# Altium PCB PCB1.PcbDoc
Units mm, origin at the board's own origin, x right, y up, seen from the top; angles counter-clockwise.
Board outline 100 x 100 mm, 2 copper layers (Top Layer, Bottom Layer); 4 components, 2 nets, 8 pads, 2 vias.
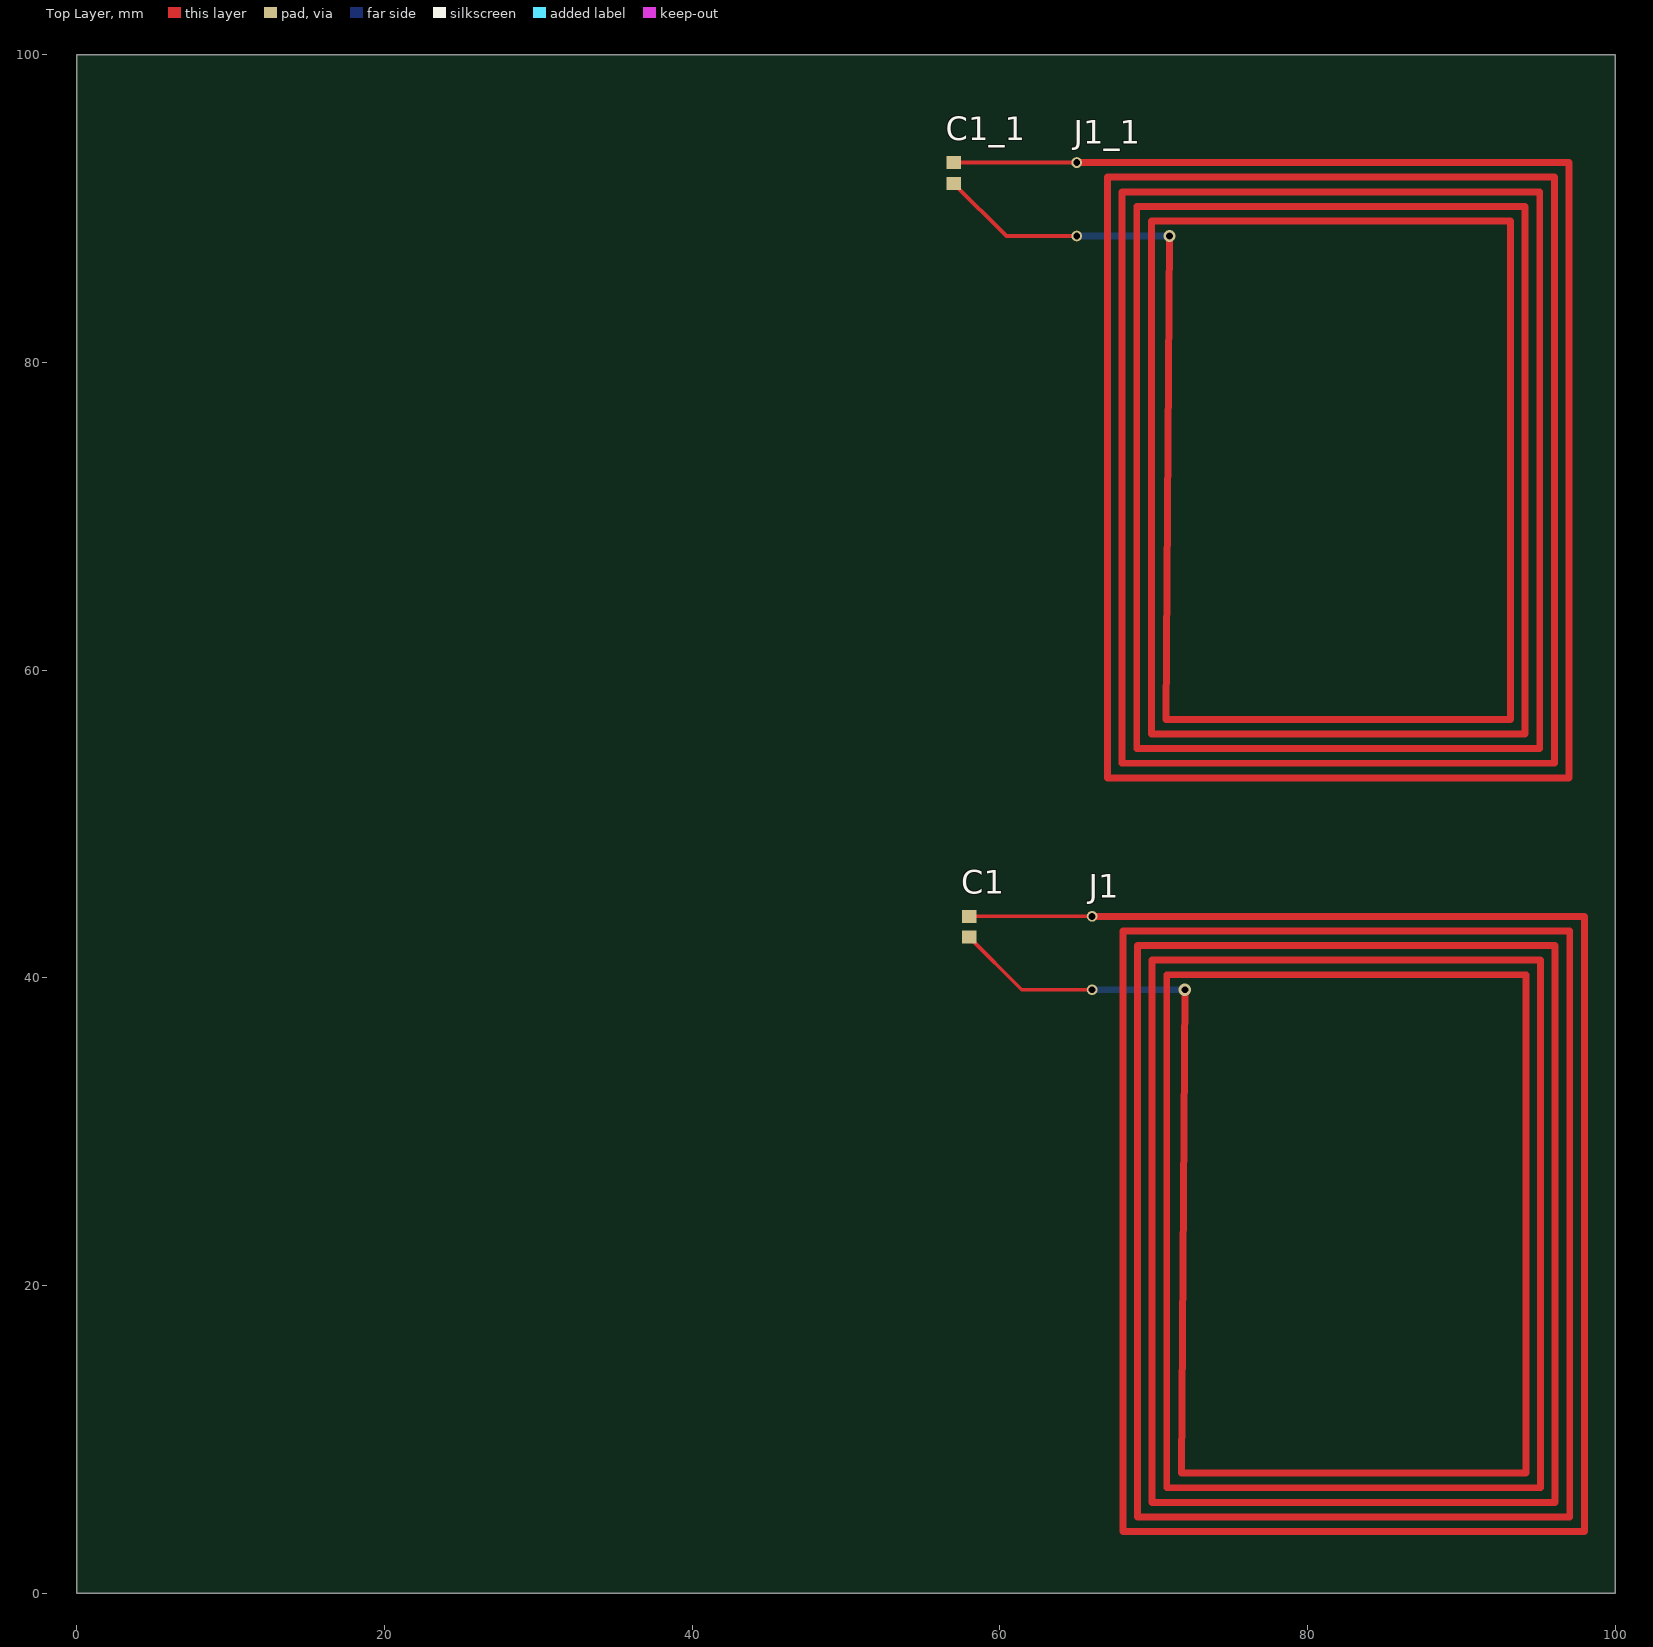
[diagram p0: Top Layer view]
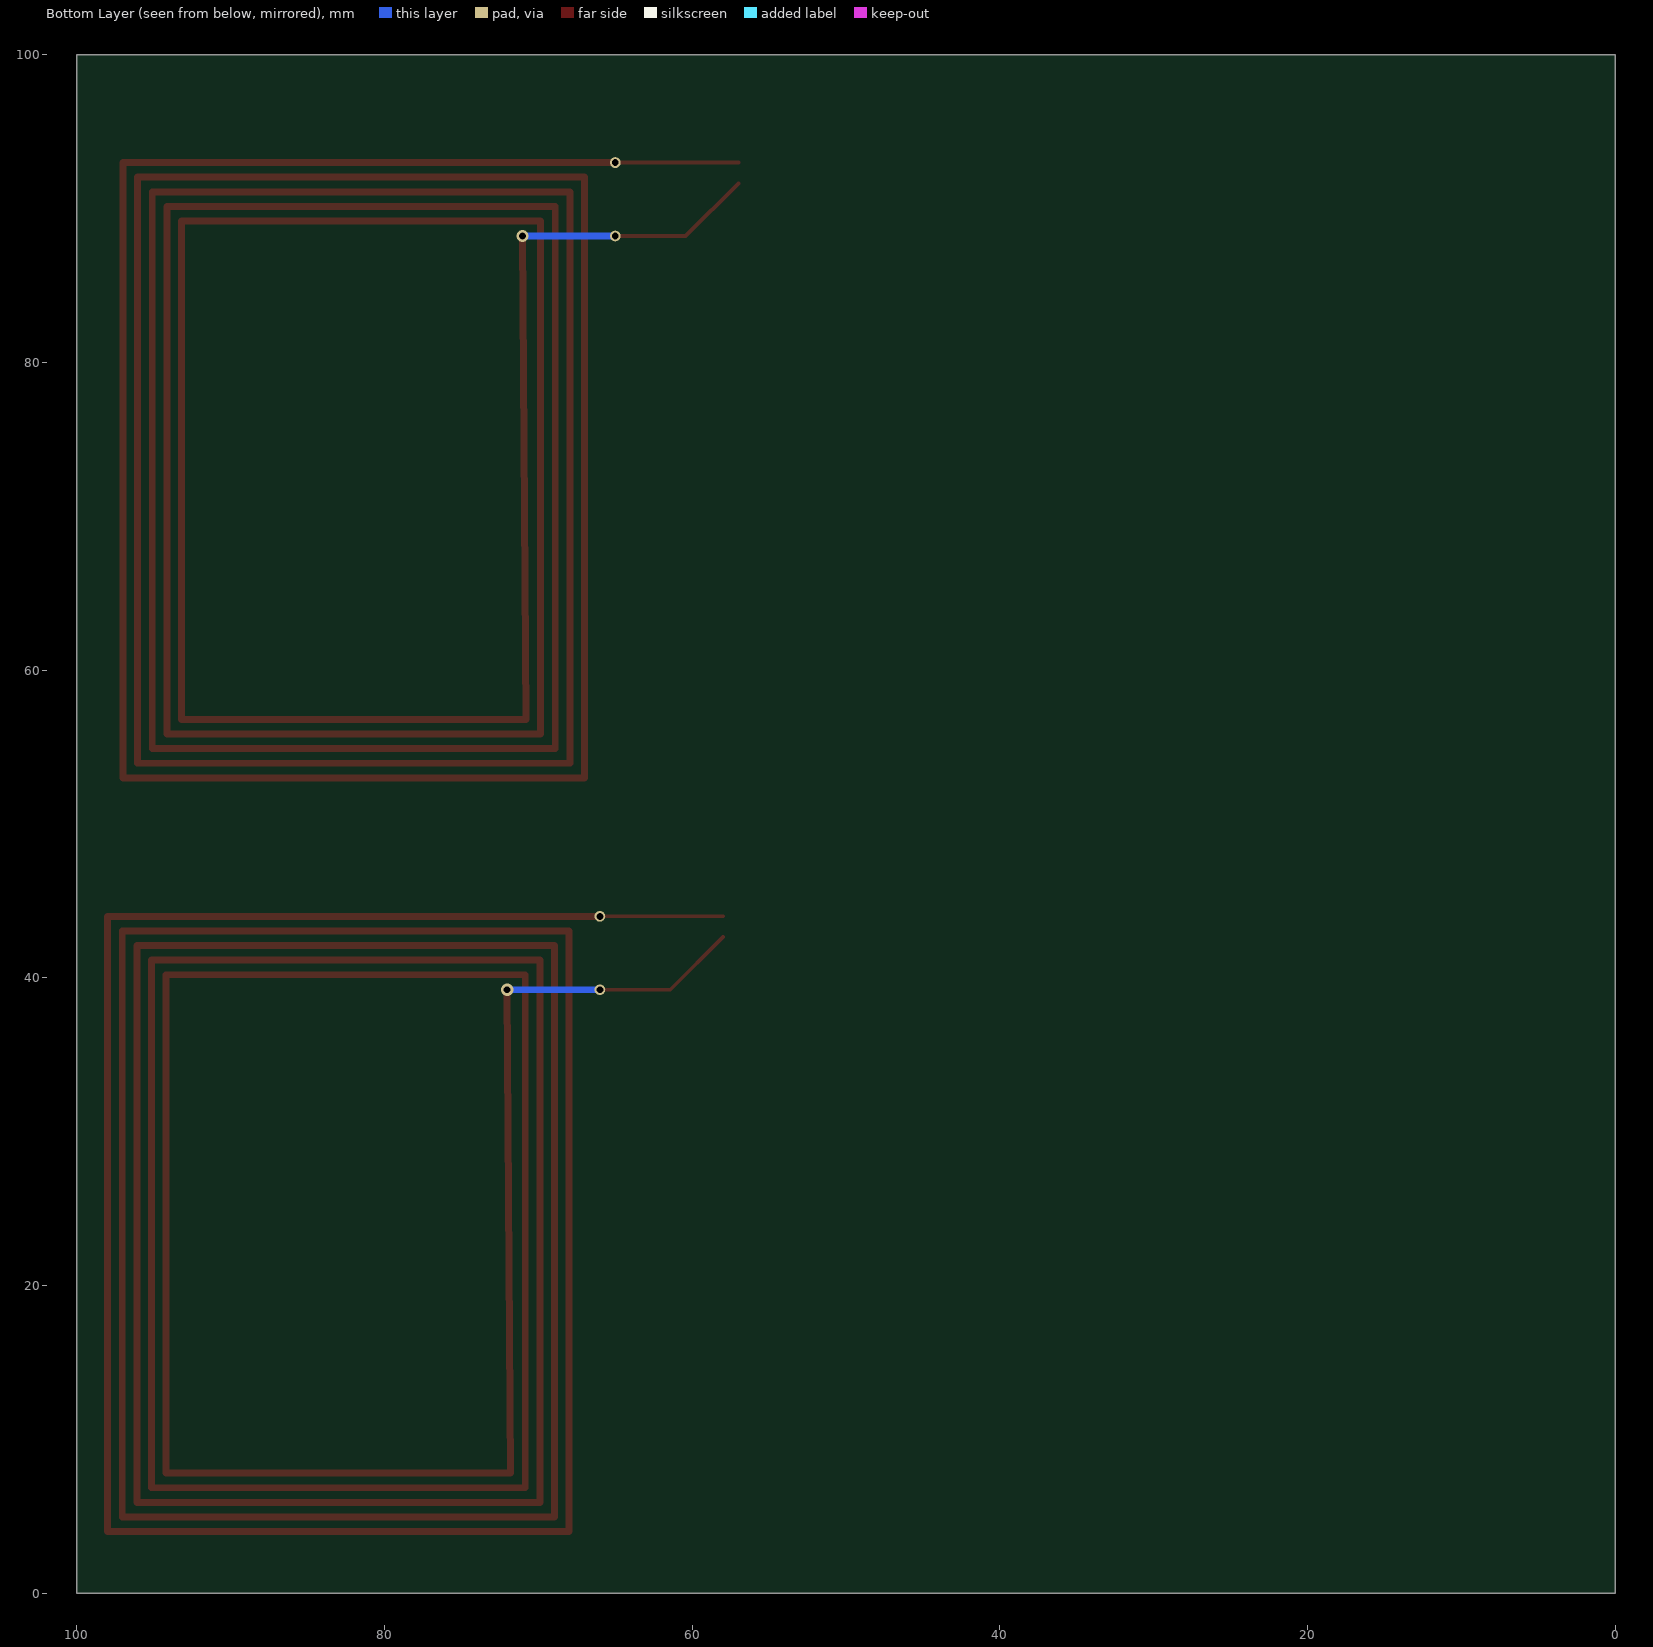
[diagram p1: Bottom Layer view, seen from below]

## Layer stack, top to bottom
Top Solder: solder mask 0.01, Solder Resist, Dk 3.5
Top Layer: signal copper 0.45
Dielectric 1: dielectric 0.32, FR-4, Dk 4.8
Bottom Layer: signal copper 0.0356
Bottom Solder: solder mask 0.0102, Solder Resist, Dk 3.5

## Board outline
0,0 100,0 100,100 0,100

## Design rules (kind name [scope] priority, off if disabled: settings)
Clearance [All] p1: gap=0.254 ignorepadtopadclearanceinfootprint=FALSE except(0: Arc-Hole Track-Hole SMDPad-Hole THPad-Hole Via-Hole Fill-Hole Poly-Hole Region-Hole Text-Hole)
PolygonConnect [All] p1: connectstyle=Relief reliefconductorwidth=0.254 reliefentries=4 polygonreliefangle="90 Angle" airgapwidth=0.254
RoutingVias [All] p1: holewidth=0.711 width=1.27 viastyle="Through Hole" minholewidth=0.711 minwidth=1.27 maxholewidth=0.711 maxwidth=1.27
SolderMaskExpansion [All] p1: expansion=0.102
Width [All] p1: maxlimit=0.254 minlimit=0.254 preferedwidth=0.254
30 further rules are at their usual default settings.

## Classes and differential pairs
component class Antenna: C1 J1

## Components (designator, comment, footprint, x,y, rotation, side; value= is the part's Value field where it differs from the comment)
C1 "CL10C820JB8NNNC" CAPC1608X08N 58,43.325 r90 top value=82pF
C1_1 "CL10C820JB8NNNC" CAPC1608X08N 57,92.325 r90 top value=82pF (schematic designator C1)
J1 "NFC_ANTENNA" NFC_ANTENNA 68,44 r0 top
J1_1 "NFC_ANTENNA" NFC_ANTENNA 67,93 r0 top (schematic designator J1)

## Footprints (in the part's own frame and the unit in brackets; to place one, negate y for a bottom-side part, rotate by r counter-clockwise, add the part's x,y. Pads: shape width x height; smd on the part's side, far side on the other; paste and mask are expansions set on the pad)
CAPC1608X08N [mm] "Chip Capacitor, 2-Leads, Body 1,60x0,80mm, IPC Medium Density"
  rect 0.85x0.95 smd: 1(-0.675,0) 2(0.675,0)
  body extent -0.85,-0.45 0.85,0.45, height 0.8
NFC_ANTENNA [mm]
  round 0.7 hole 0.45 unplated: 1(-2,-4.775) 2(-2,0)
  Top Layer lines w0.45: -2,0 0,0 30,0 30,-40 0,-40 0,-0.95 29.05,-0.95 29.05,-39.05 0.95,-39.05 0.95,-1.9 28.1,-1.9 28.1,-38.1 1.9,-38.1 1.9,-2.85 27.15,-2.85 27.15,-37.15 2.85,-37.15 2.85,-3.8 26.2,-3.8 26.2,-36.2 3.8,-36.2 4.025,-4.775
  Bottom Layer lines w0.45: -2,-4.775 4.025,-4.775

## Part data
C1 C1_1: "Cap Ceramic 82pF 50V C0G 5% SMD 0603 125C Paper T/R", Capacitance=82pF, Case/Package=0603, Case Code (Metric)=1608, Dielectric=C0G, Manufacturer=Samsung, Max Operating Temperature=125°C, Min Operating Temperature=-55°C, Package Quantity=1, Supplier Part Number 1=1276-1242-1-ND, Temperature Coefficient=300ppm/°C, Tolerance=5%, Voltage=50V, Case Code (Imperial)=0603, Contact Plating=Tin, Depth=0.8mm, Height=0.8mm, Lead Free="Lead Free", Length=1.6mm, Manufacturer Part Number=CL10C820JB8NNNC, Material=Ceramic, Mount="Surface Mount", Packaging="Tape and Reel", Pricing 1="1=0.1, 10=0.058, 100=0.0257, 500=0.0184, 1000=0.0144 (USD)", Radiation Hardening=No, Stock 1=40000, Supplier 1=Digi-Key, Thickness=0.035inch, Voltage Rating=50V, Voltage Rating (DC)=50V, Width=0.031inch

## Via types
v1: diameter 0.8, hole 0.45, Top Layer to Bottom Layer, 2 vias

## Nets (pads, with @x,y where several pads share a name; then routed paths per layer and width w, separated by ;. In a path a pad name is that pad's centre, name@x,y a point inside that pad or via, vN(x,y) a via of type N, cw(c..) or ccw(c..) an arc to the next point about the centre after c; other vN are vias at no path point)
NetC1_1: C1.1 J1.1 | length 9.4
  Top Layer w0.254: C1.1 61.425,39.225 J1.1
  other v1: 72.025,39.225
NetC1_2: C1.2 J1.2 | length 8
  Top Layer w0.254: C1.2 J1.2
pads on no net: C1_1.1 C1_1.2 J1_1.1 J1_1.2
copper on no net: | length 17.4
  Top Layer w0.254: 57,91.65 60.425,88.225 65,88.225 ; 57,93 65,93
  other v1: 71.025,88.225

## Silkscreen, mask and mechanical layers (free items; w line width, h text height)
Top Solder:
  rectangle: 66,50 98,95
  rectangle: 67,1 99,46